# Altium PCB bat_pak_reva.PcbDoc
Units mil, origin at the board's own origin, x right, y up, seen from the top; angles counter-clockwise.
Board outline 3859 x 3909 mil, 2 copper layers (Top Layer, Bottom Layer), stack 41.8 mil thick; 11 components, 7 nets, 48 pads, 0 vias.
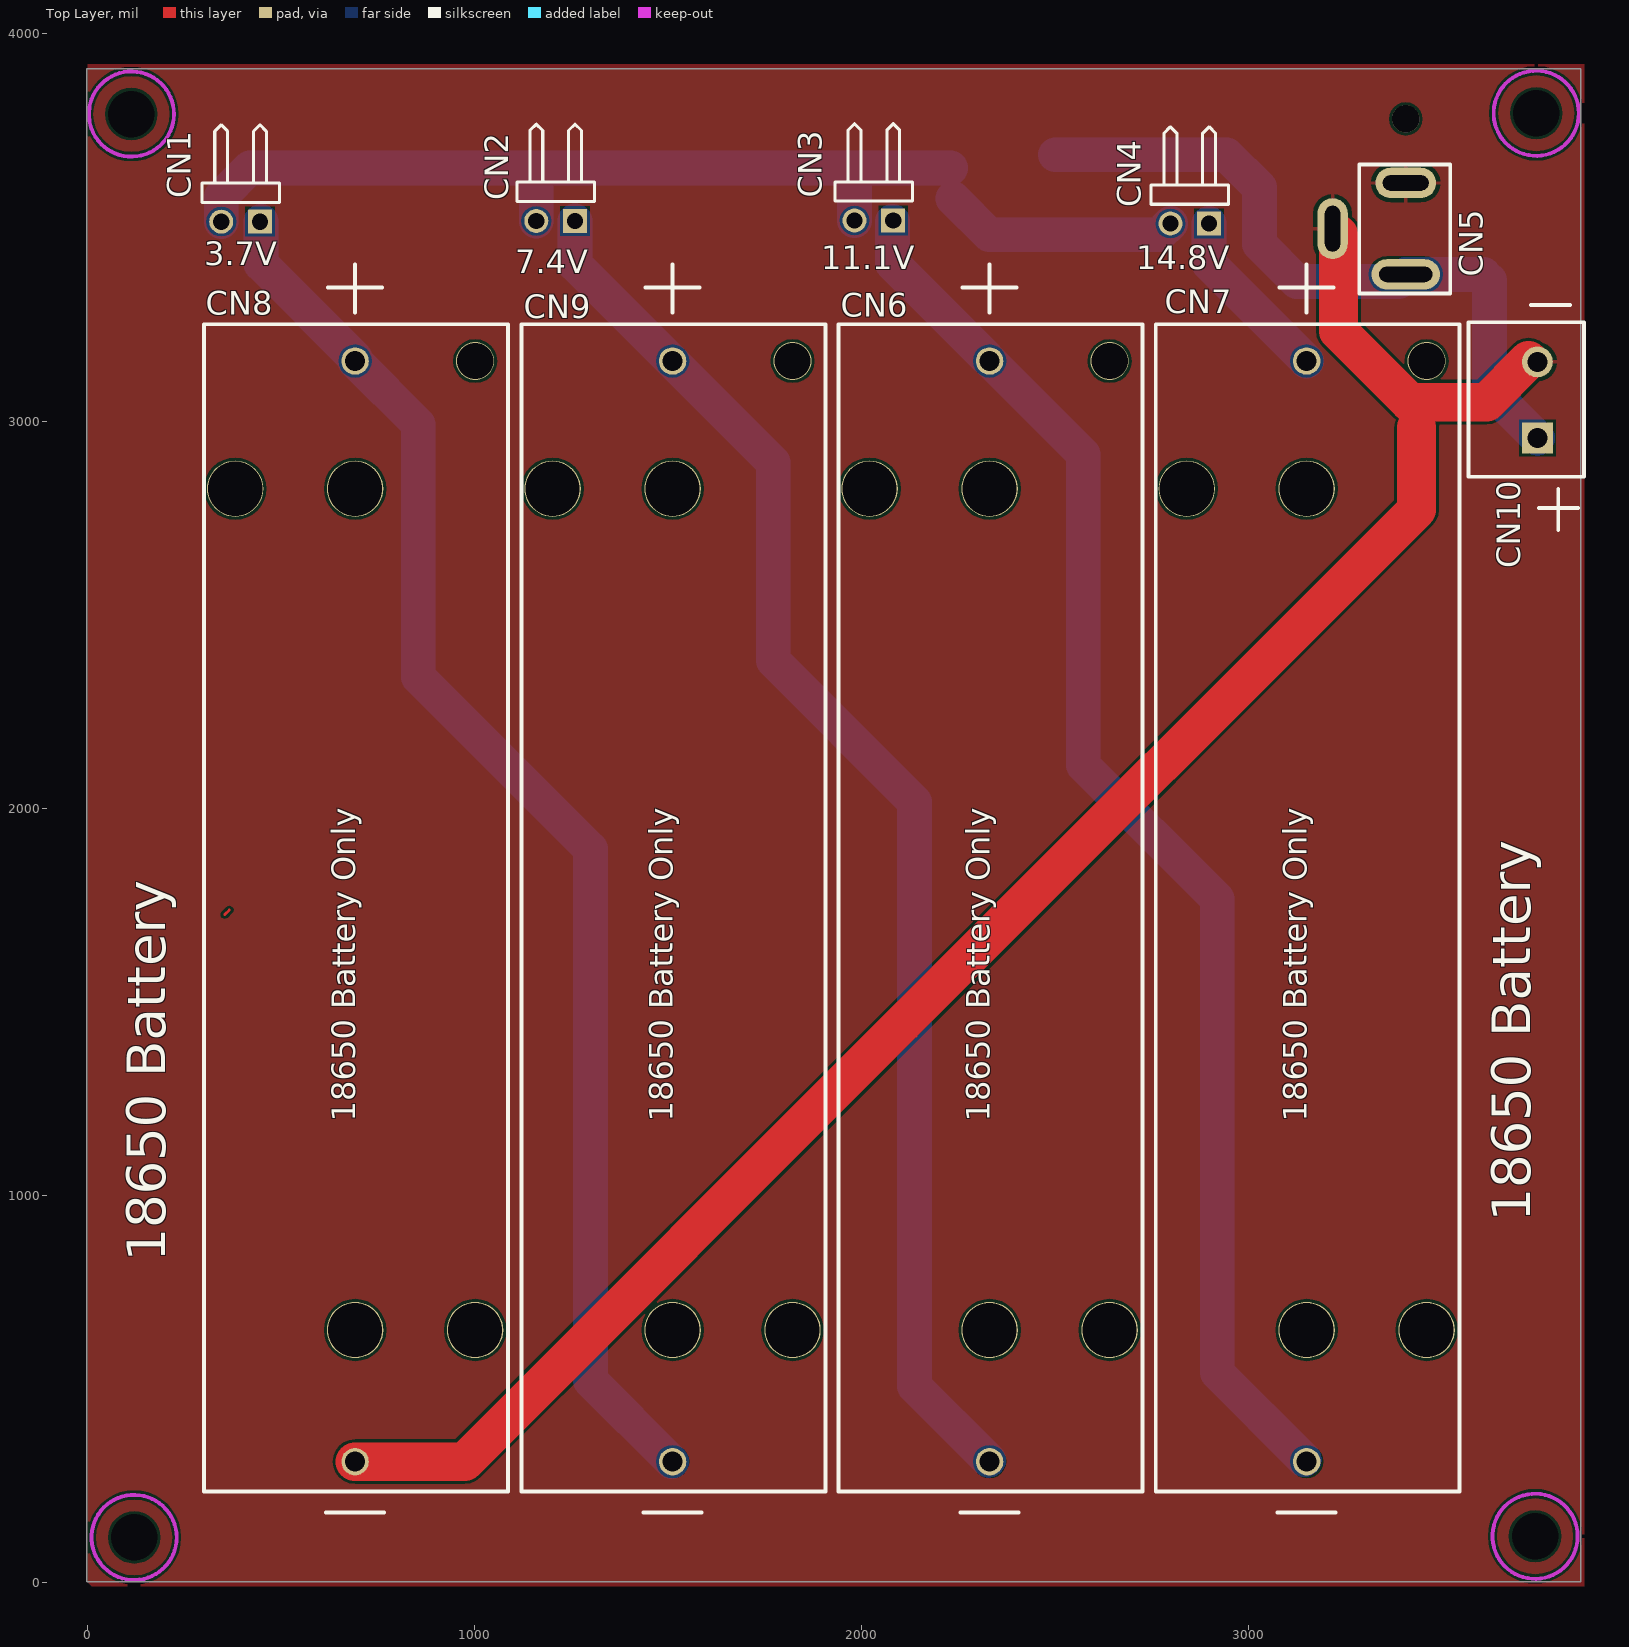
[diagram p0: Top Layer view]
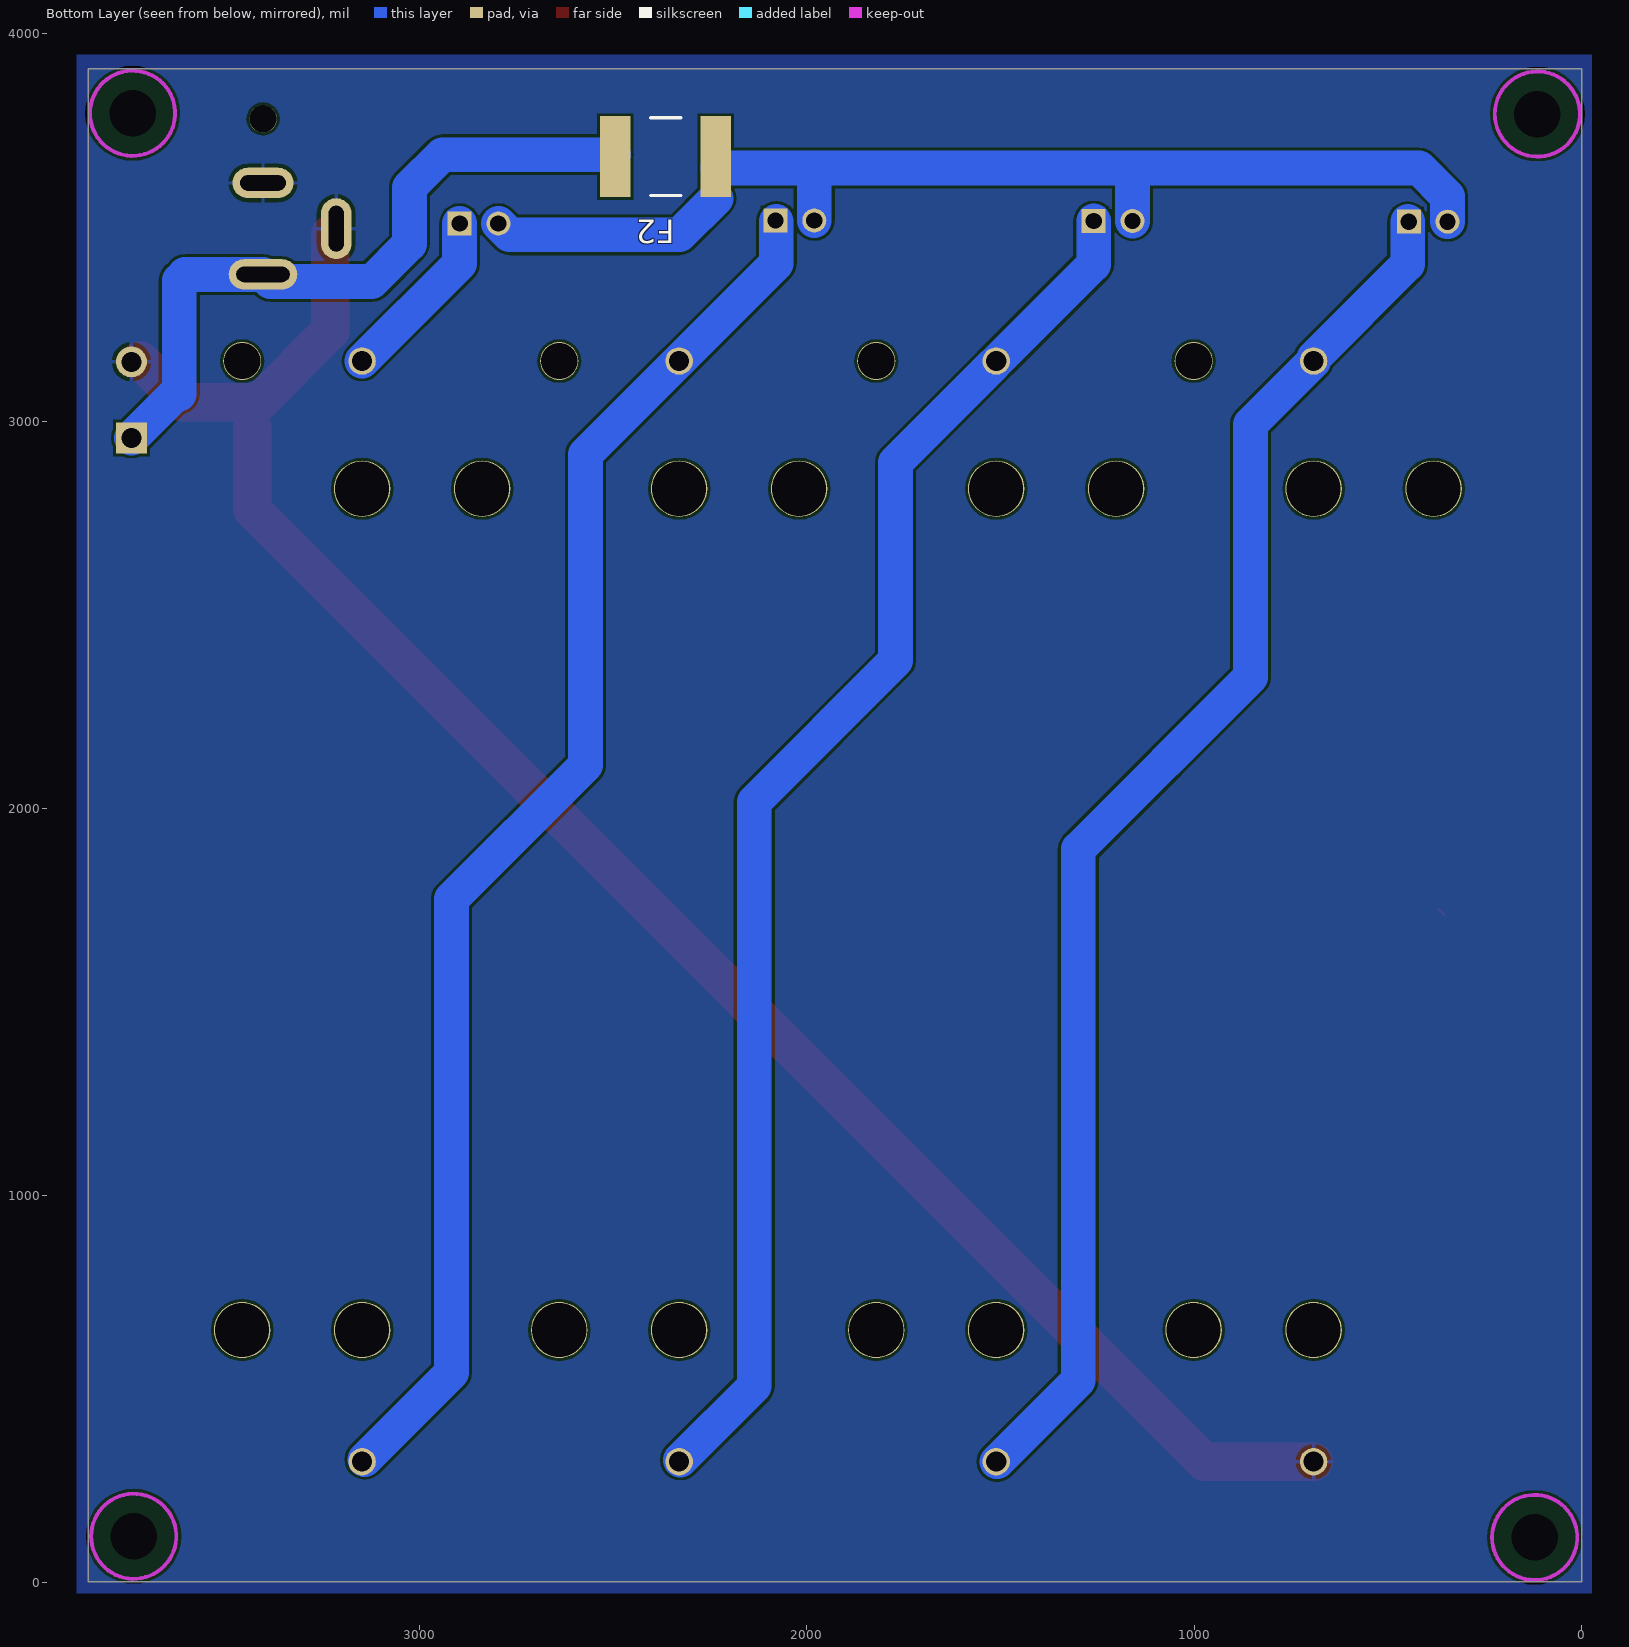
[diagram p1: Bottom Layer view, seen from below]
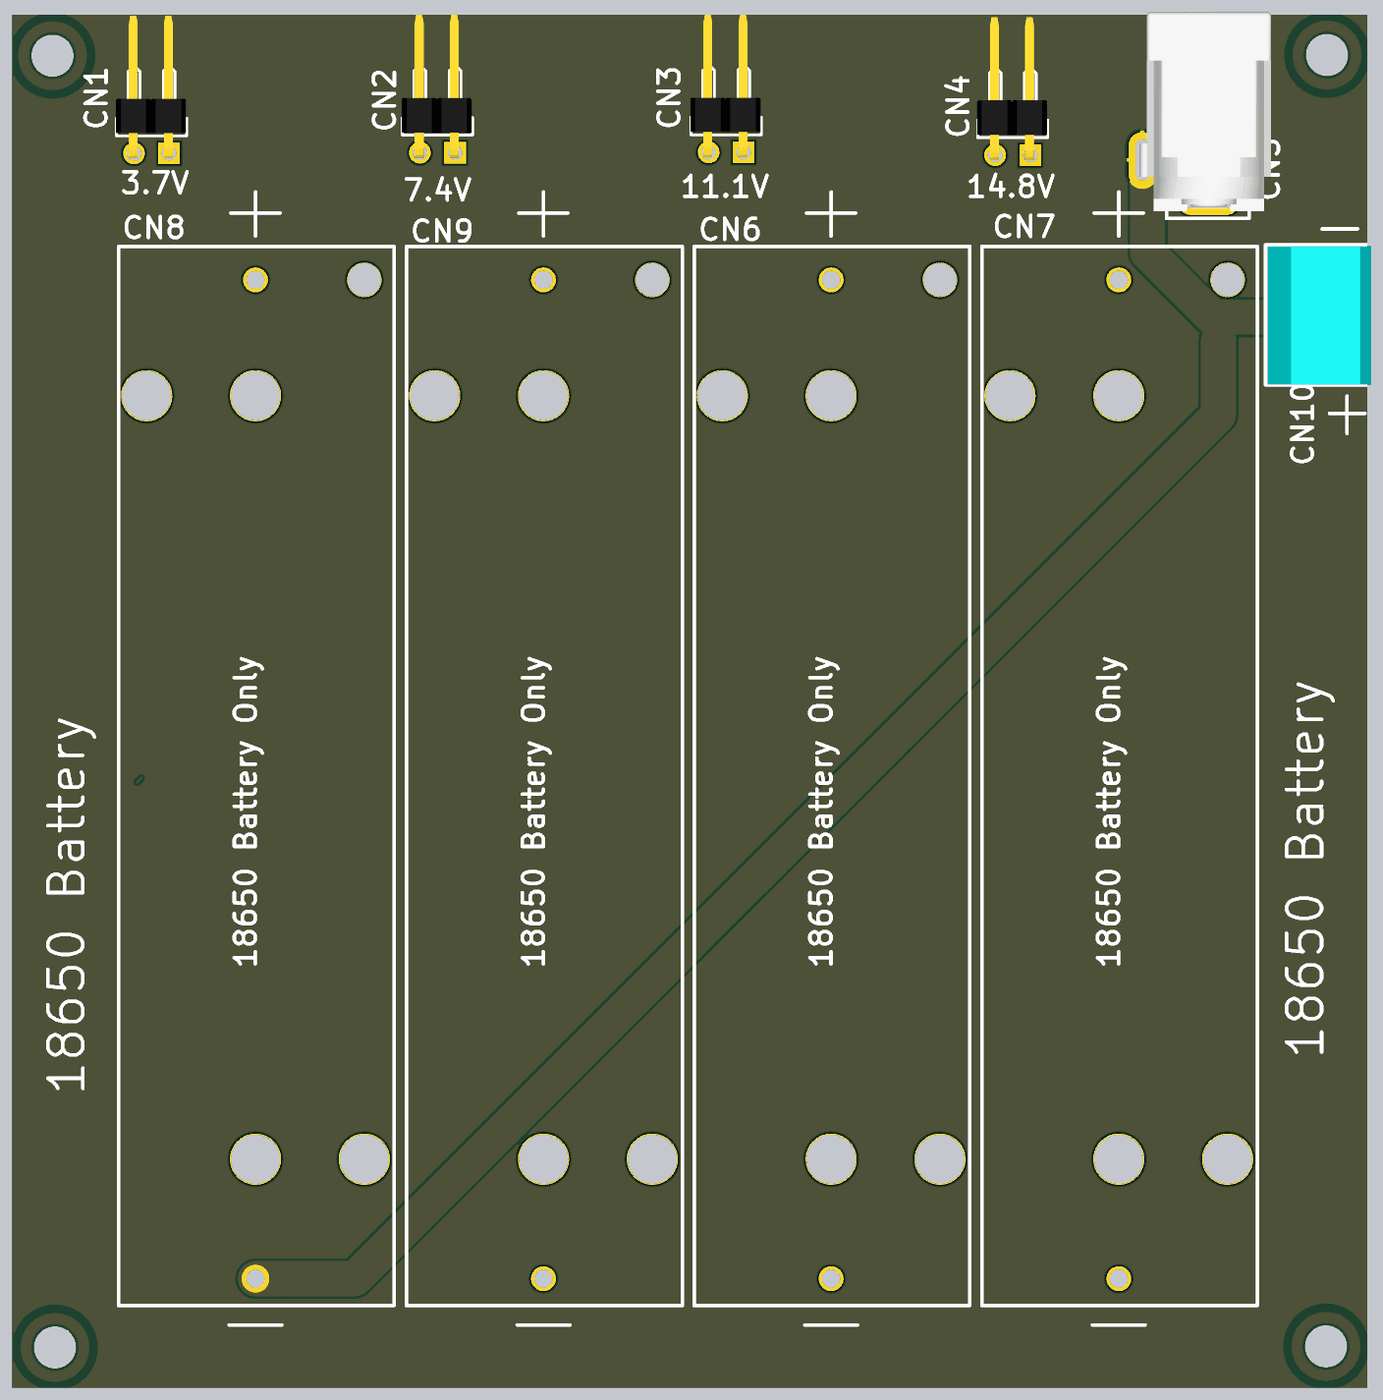
[diagram p2: 3D render of the assembled board from above, using the file's embedded part models]

## Layer stack, top to bottom
Top Solder: solder mask 0.6, Solder Resist, Dk 3.5
Top Layer: signal copper 1.4
Dielectric 2: core 39, Dk 4.2
Bottom Layer: signal copper 1.4
Bottom Solder: solder mask 0.6, Solder Resist, Dk 3.5

## Board outline
-2,1 3857,1 3857,3910 -2,3910

## Design rules (kind name [scope] priority, off if disabled: settings)
Clearance "Clearance Polygons" [InPolygon] p1: gap=7 ignorepadtopadclearanceinfootprint=FALSE except(0: Arc-Hole Track-Hole SMDPad-Hole THPad-Hole Via-Hole Fill-Hole Poly-Hole Region-Hole Text-Hole)
Clearance [All] p2: gap=7 ignorepadtopadclearanceinfootprint=FALSE except(0: Arc-Hole Track-Hole SMDPad-Hole THPad-Hole Via-Hole Fill-Hole Poly-Hole Region-Hole Text-Hole)
DiffPairsRouting [All] p1: maxlimit=7.5 minlimit=6.5 mostfreqgap=7 toplayer_minwidth=6 toplayer_maxwidth=15 toplayer_prefwidth=6 bottomlayer_minwidth=6 bottomlayer_maxwidth=15 bottomlayer_prefwidth=6 maxuncoupledlength=300
HoleSize [All] p1: absolutevalues=TRUE maxlimit=200 minlimit=8 maxpercent=80.000 minpercent=20.000
HoleToHoleClearance [All] p1: gap=5 allowstackedmicrovias=TRUE
MinimumSolderMaskSliver [All] p1: minsoldermaskwidth=0
PolygonConnect [All] p1: connectstyle=Relief reliefconductorwidth=10 reliefentries=4 polygonreliefangle="90 Angle" airgapwidth=10
RoutingVias [All] p1: holewidth=20 width=32 viastyle="Through Hole" minholewidth=12 minwidth=22 maxholewidth=26 maxwidth=50
SilkToSilkClearance [All] p1: silktosilkclearance=5
SilkToSolderMaskClearance [IsPad] p1: minsilkscreentomaskgap=1 clearancetoexposedcopper=TRUE
SolderMaskExpansion [All] p1: expansion=4
Width [All] p1: maxlimit=100 minlimit=7 preferedwidth=7 minimp=50.000000 maximp=50.000000 favimp=50.000000
24 further rules are at their usual default settings.

## Components (designator, comment, footprint, x,y, rotation, side; value= is the part's Value field where it differs from the comment)
CN1 "Header 2H" HDR1X2H 445,3515 r180 top locked
CN2 "Header 2H" HDR1X2H 1259,3517 r180 top locked
CN3 "Header 2H" HDR1X2H 2081,3518 r180 top locked
CN4 "Header 2H" HDR1X2H 2897,3510 r180 top locked
CN5 "PJ-050AH" PJ-050AH 3405,3378.78 r0 top locked
CN6 "18650 Bat" battery_holder_18650 2330,3155 r0 top locked
CN7 "18650 Bat" battery_holder_18650 3149,3155 r0 top locked
CN8 "18650 Bat" battery_holder_18650 691,3155 r0 top locked
CN9 "18650 Bat" battery_holder_18650 1511,3155 r0 top locked
CN10 "TBlockx2" TB-5MM-X2 3745,2956 r180 top locked
F2 "2920L500/16MR" "2920 Fuse" 2365,3683 r180 bottom

## Footprints (in the part's own frame and the unit in brackets; to place one, negate y for a bottom-side part, rotate by r counter-clockwise, add the part's x,y. Pads: shape width x height; smd on the part's side, far side on the other; paste and mask are expansions set on the pad)
"2920 Fuse" [mm] "2620 Fuse, 2-Leads, Body 7.36x5.12mm, IPC Medium Density"
  rect 2x5.3 smd: 1(-3.3,0) 2(3.3,0)
  silkscreen extent -1,-2.55 1,2.55, body extent -3.99,-2.72 3.99,2.72, height 2
battery_holder_18650 [mm]
  round 3.7 hole 3.55: 0(-7.87,-8.38) 0(0,-63.58) 0(0,-8.38) 0(7.87,-63.58)
  round 2.5 hole 2.39: 0(7.87,0)
  round 1.8 hole 1.32: 1(0,0) 2(0,-72.22)
  silkscreen extent -9.91,-75.56 10.03,6.35
HDR1X2H [mil] "Connector; Header; 2 Position; Right Angle"
  rect 62x62 hole 42: 1(0,0)
  round 62 hole 42: 2(100,0)
  silkscreen extent -50,-250 150,-50, body extent -48,-392 152,14, height 98
PJ-050AH [mm] "Power Connector, 2.0mm ID, 5.5mm OD"
  round 1.8 hole 1.8 unplated: 0(0,10.2)
  oval 4.5x2 hole 1 slot 3.5 at 0 deg: 1(0,0)
  oval 4x2 hole 1 slot 3 at 0 deg: 2(0,6)
  oval 2x4 hole 1 slot 3 at 90 deg: 3(-4.8,3)
  silkscreen extent -3.05,-1.24 2.92,7.21, body extent -4.98,-0.72 4.52,13.68, height 11
TB-5MM-X2 [mil] "5mm Terminal Block x 2"
  rect 80x80 hole 52: 1(0,0)
  round 80 hole 52: 2(0,-196.85)
  silkscreen extent -120,-299 178,100, body extent -122,-295 173,99, height 394

## Part data
CN1 CN2 CN3 CN4: library part CMP-001-0287-01, "Header, 2-Pin, Right Angle", Current Rating="3A per Contact", Insulation Color=Black, Manufacturer="Harwin Inc.", Manufacturer Part Number=M20-9960245, Material Flammability Rating="UL94 V-0", Operating Temperature="-40°C ~ 105°C", Voltage Rating=-, Applications=-, ComponentLink1Description=https://cdn.harwin.com/pdfs/M20-996.pdf, ComponentLink1URL=https://cdn.harwin.com/pdfs/M20-996.pdf, Component Name="Header 2H", Connector Type="Header, Cuttable", Contact Finish - Mating=Gold, Contact Finish - Post=-, Contact Finish Thickness - Mating=-, Contact Finish Thickness - Post=-, Contact Length - Mating="0.240\" (6.10mm)", Contact Length - Post="0.118\" (3.00mm)", Contact Material=Brass, Contact Shape=Square, Contact Type="Male Pin", Fastening Type=-, Features=-, Ingress Protection=-, Insulation Height="0.100\" (2.54mm)", Insulation Material="Polyamide (PA6T), Nylon 6T", LatestRevisionDate=17-Jul-2002, LatestRevisionNote="Re-released for DXP Platform.", Mated Stacking Heights="11.72mm, 12.62mm, 12.72mm, 13.62mm, 18.22mm, 19.12mm", Mounting Type="Through Hole, Right Angle", Number of Positions=2, Number of Positions Loaded=All, Number of Rows=1, Overall Contact Length=-, Packaging=Bulk, Part Status=Active, Pin Count=2, Pitch - Mating="0.100\" (2.54mm)", Pricing 1="1=0.15, 10=0.141, 100=0.087, 500=0.072, 1000=0.063, 5000=0.054, 10000=0.0525 (USD)", Publisher="Altium Limited", RoHS="RoHS Compliant", Row Spacing - Mating=-, Shrouding=Unshrouded, Stock 1=17504, Style="Board to Board or Cable", Termination=Solder
CN5: library part CMP-001-0507-01, "Power Barrel Connector Jack 2.00mm ID 5.50mm OD Through Hole, Right Angle", Color=Black, Current Rating=5A, Manufacturer=CUI, Operating Temperature="-25°C ~ 85°C", Voltage - Rated=24VDC, ComponentLink1Description=http://www.mouser.com/ds/2/670/PJ-050AH-524150.pdf, ComponentLink1URL=http://www.mouser.com/ds/2/670/PJ-050AH-524150.pdf, Component Name=PJ-050AH, Connector Type=Jack, Contact Material=Copper, Contact Material - Plating=Nickel, Family="Barrel - Power Connectors", Features=-, Gender=Male, Housing Color=Black, Housing Material=Thermoplastic, Internal Switch(s)="Single Switch, Normally Closed", Manufacturer Part Number=PJ-050AH, Mounting Type="Through Hole, Right Angle", Number of Positions/Contacts="2 Conductors, 3 Contacts", Pin Count=3, Plug/Mating Plug Diameter="2.1mm ID, 5.5mm OD", Pricing 1="1=0.78, 10=0.689, 25=0.648, 50=0.621, 100=0.594, 250=0.54, 500=0.486, 1000=0.432, 2500=0.3915 (USD)", Series=-, Shielding=Unshielded, Stock 1=4408, Termination=Solder
CN10: library part CMP-001-0545-01, "5mm Terminal Block x 2", Manufacturer=OST, MPN=OSTTC020160, Component Name=TBlockx2, Pin Count=2, PN=164794, Vendor=Jameco
F2: library part CMP-001-0852-01, "PTC RESET FUSE 16V 5A 2920", Case/Package=2920, Case Code (Metric)=7351, Hold Current=5A, Max Current Rating=40A, Max Operating Temperature=85°C, Max Power Dissipation=2W, Min Operating Temperature=-40°C, Package Quantity=1, Trip Current=10A, Voltage Rating (DC)=16V, Case Code (Imperial)=2920, Height=1.6mm, Lead Free="Lead Free", Length=7.98mm, Packaging="Tape and Reel", REACH SVHC="No SVHC", Termination=SMD/SMT, Time to Trip=5s, Width=5.44mm

## Free pads (board coordinates)
  round 110 hole 120 unplated: 0(113,3793) 0(120,116) 0(3739,119) 0(3742,3795)

## Nets (pads, with @x,y where several pads share a name; then routed paths per layer and width w, separated by ;. In a path a pad name is that pad's centre, name@x,y a point inside that pad or via, vN(x,y) a via of type N, cw(c..) or ccw(c..) an arc to the next point about the centre after c; other vN are vias at no path point)
GND: CN5.2 CN5.3 CN8.2 CN10.2 | length 5005.1
  Top Layer w7: CN5.3 CN5.3@3216.02,3551.98 ; CN5.2 CN5.2@3444.37,3615
  Top Layer w20: CN5.3 CN5.3@3231,3481.91
  Top Layer w100: CN8.2@690.84,311.61 973.61,311.61 2107,1445 3433,2771 3433,2983 ; CN5.3@3231,3481.91 3231,3232.64 3414.85,3048.79 3613.79,3048.79 CN10.2@3722,3157
  Bottom Layer w7: CN5.3 CN5.3@3216.02,3536.26 ; CN5.2@3405,3599 CN5.2
NetCN1_1: CN1.1 CN8.1 CN9.2 | length 3642.8
  Bottom Layer w7: CN8.1@690.84,3154.92 CN8.1@690.84,3163.16
  Bottom Layer w90: CN1.1@448,3515 448,3406 CN8.1@690.84,3163.16 ; CN8.1@690.84,3154.92 854,2991.76 854,2339 1299,1894 1299,521.46 CN9.2@1508.84,311.61
NetCN1_2: CN1.2 CN2.2 CN3.2 CN4.2 F2.2 | length 2974.4
  Bottom Layer w7: 1159,3653 1160,3654 ; 2235.08,3574.92 F2.2
  Bottom Layer w90: CN1.2 345,3580 419,3654 1160,3654 1981,3654 ; CN2.2 1159,3653 ; CN3.2 1981,3654 ; F2.2@2229.45,3654 1981,3654 ; 2235.08,3574.92 2329,3481 2768,3481 CN4.2
NetCN2_1: CN2.1 CN6.2 CN9.1 | length 3643.7
  Bottom Layer w90: CN2.1 1259,3404.76 1771,2892.76 1771,2381 2136,2016 2136,506.69 CN6.2@2327,315.69
NetCN3_1: CN3.1 CN6.1 CN7.2 | length 3641.4
  Bottom Layer w7: CN3.1@2079,3516 CN3.1
  Bottom Layer w90: CN3.1@2079,3516 2079,3407 2572,2914 2572,2111 2918,1765 2918,541.69 CN7.2@3142,317.69
NetCN4_1: CN4.1 CN7.1 | length 459.4
  Bottom Layer w90: CN4.1 2897,3407 CN7.1
NetCN5_1: CN5.1 CN10.1 F2.1 | length 1828.7
  Bottom Layer w7: F2.1 F2.1@2499.92,3688 ; CN5.1@3386.22,3360 CN5.1 ; 3606.22,3378.78 3621.35,3363.65 ; 3621.35,3069.65 3631.35,3069.65
  Bottom Layer w90: F2.1@2499.92,3688 2942,3688 3027,3603 3027,3457 3124,3360 CN5.1@3386.22,3360 ; CN5.1 3606.22,3378.78 ; 3621.35,3069.65 3621.35,3363.65 ; 3631.35,3069.65 CN10.1
pads on no net: CN5.0 CN6.0 CN7.0 CN8.0 CN9.0
copper on no net: | length 17
  Top Layer w7: 354.08,1724.94 366.13,1737

## Polygon pours and split planes (outlines as drawn)
GND on Bottom Layer "bottom" (solid, remove dead copper, pour order 2): -28,3946 3886,3946 3886,-28 -28,-28
GND on Top Layer "GND_L01_P004" (solid, pour order 4): 0,0 0,3922 3866,3922 3866,-10 10,-10

## Keep-outs
Keep-Out Layer:
  circle w10: c3742,3795 r110
  circle w10: c3739,119 r110
  circle w10: c120,116 r110
  circle w10: c113,3793 r110

## Silkscreen, mask and mechanical layers (free items; w line width, h text height)
Top Overlay:
  lines w10: 3728,3300 3753.25,3300 3803.75,3300 3829,3300 ; 3749,2775 3850,2775 ; 3799,2718 3799,2824
  text "3.7V" at 301,3402 h60
  text "11.1V" at 1895,3392 h60
  text "14.8V" at 2709,3392 h60
  text "7.4V" at 1105,3382 h60
  text "18650 Battery" at 3727,931 h100 r90
  text "18650 Battery" at 200,828 h100 r90
Mechanical 1:
  lines w10: 0,0 3856,0 3856,3911 0,3911 0,0
Drill Drawing:
  lines w50: 0,6 0,3918 3859,3914.82 3859,6 0,6

## Text inside footprints (layer, text, board x,y; h text height)
CN6: Top Overlay "18650 Battery Only" at 2330,1190 h60 r90
CN7: Top Overlay "18650 Battery Only" at 3149,1190 h60 r90
CN8: Top Overlay "18650 Battery Only" at 691,1190 h60 r90
CN9: Top Overlay "18650 Battery Only" at 1511,1190 h60 r90